# Altium PCB science_board_25.PcbDoc (part 2 of 2)
Units mil, origin at the board's own origin, x right, y up, seen from the top; angles counter-clockwise.
Board outline 2760 x 2600 mil, 4 copper layers (Top Layer, Layer 2 (GND), Layer 3 (GND), Bottom Layer), stack 23.756 mil thick; 143 components, 77 nets, 418 pads, 140 vias.
Unrouted connection lines stored in the file: 90.
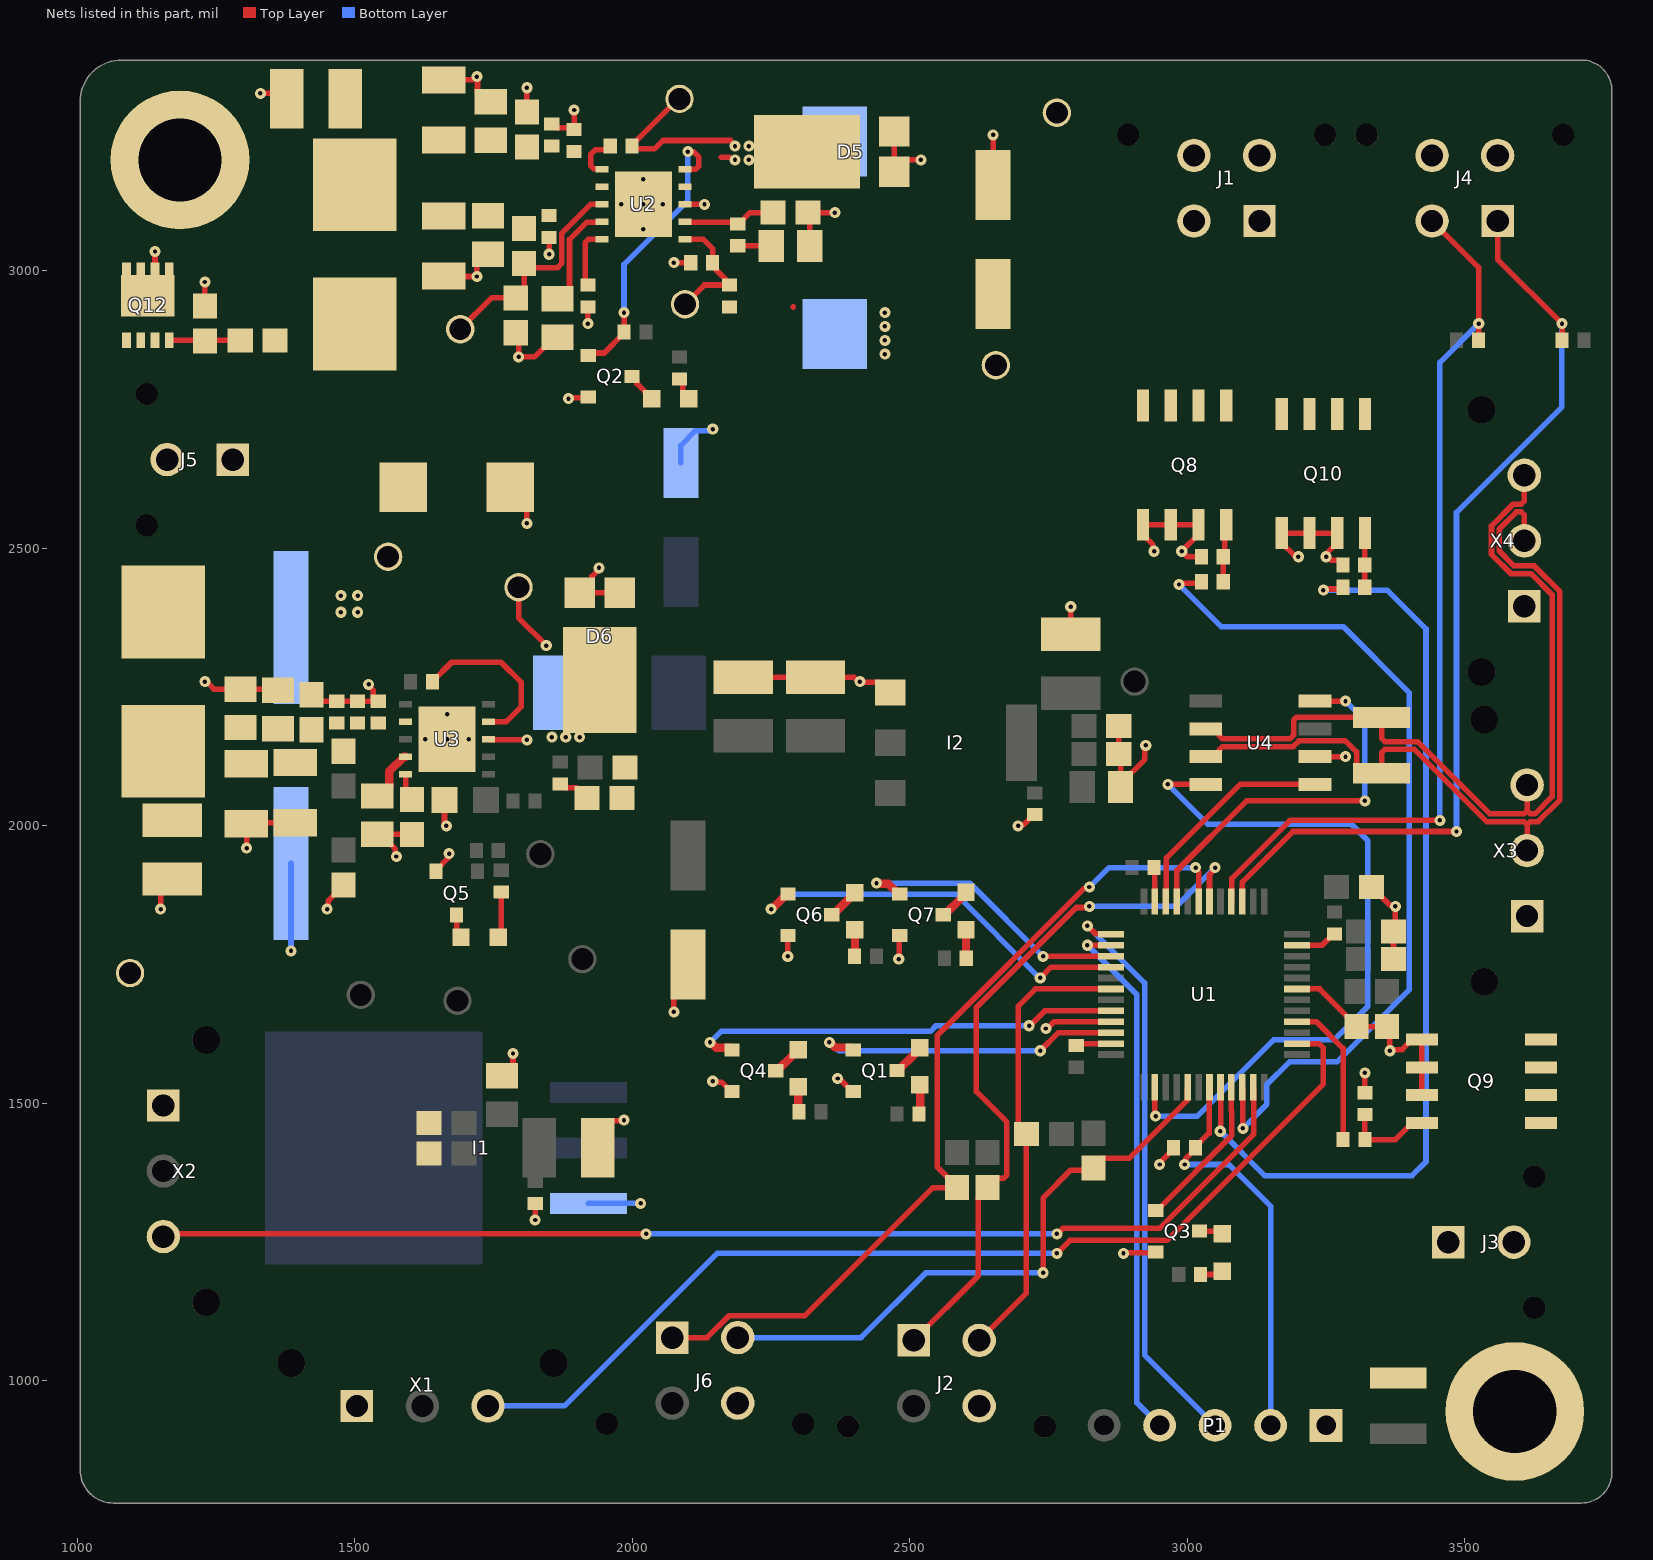
[diagram p4: the nets of this part, all layers, seen from the top]

## Via types
v1: diameter 20, hole 8, Top Layer to Bottom Layer, 140 vias

## Nets (pads, with @x,y where several pads share a name; then routed paths per layer and width w, separated by ;. In a path a pad name is that pad's centre, name@x,y a point inside that pad or via, vN(x,y) a via of type N, cw(c..) or ccw(c..) an arc to the next point about the centre after c; other vN are vias at no path point) (continued)
7V_RTCLK: R21.2 U3.5 | length 50.1
  Top Layer w10: U3.5@1591.49,2093.05 1591.49,2059.18 R21.2@1602.95,2047.72
7V_SSTR: C34.2 U3.4 | length 96.8
  Top Layer w15: C34.2@1540.5,2054.07 1546.6,2054.07 1561.93,2069.41 1561.93,2097.71 1588.77,2124.55 U3.4@1591.49,2124.55
7V_SW: 7V_SW.1 C14.2 D6.2 L2.1 U3.9 | length 429.3
  Top Layer w10: C14.2@1639.68,2260 1674.68,2295 1763.28,2295 1800,2258.28 1800,2215 1772.54,2187.54 U3.9@1741.09,2187.54 ; 7V_SW.1@1795,2430 1795,2375 v1(1845,2325)
  other v1: 1855,2160 1880,2160 1905,2160
12V_BOOT: C11.1 U2.1 | length 84.8
  Top Layer w10: U2.1@1945.2,3182.99 1944.29,3183.9 1930.86,3183.9 1925,3189.76 1925,3210 1933.5,3218.5 1953.82,3218.5 C11.1@1960.32,3225
12V_COMP: C16.2 R8.2 U2.7 | length 168.7
  Top Layer w10: U2.7@2094.8,3088.5 2095.71,3087.6 2187.09,3087.6 R8.2@2190,3084.68 2191.97,3084.68 2212.28,3105 C16.2@2253.5,3105
12V_EN: 12V_EN.1 R19.1 R20.2 U2.3 | length 415.9
  Top Layer w10: 12V_EN.1@1690,2895 1746.5,2951.5 R20.2@1790,2951.5 1805,2966.5 R19.1@1805,3013.5 1812.86,3005.65 1864.79,3005.65 1872.78,3013.64 1872.78,3067.78 1925,3120 U2.3@1946.93,3120
12V_FB: 12V_FB.1 R7.1 R10.2 U2.6 | length 225.5
  Top Layer w10: U2.6@2094.8,3057.01 2127.99,3057.01 2144.68,3040.32 R10.2@2144.68,3015 2151.5,3008.19 2151.5,3001.22 2173.03,2979.68 R7.1@2175,2979.68 ; 12V_FB.1@2095,2940 2129.68,2974.68 R7.1@2175,2974.68
12V_HEATER: 12V_H.1 C10.2 J1.3 J1.4 L1.2 R7.2 | length 0.4
  Top Layer w10: R7.2@2175,2935.32 R7.2@2175.16,2935.16 ; 2289.84,2935.16 2290,2935
  other v1: 2455,2850 2455,2875 2455,2900 2455,2925
12V_PGOOD: Q2.1 R5.1 U2.10 | length 524.2
  Top Layer w10: Q2.1@1920.63,2847.4 1925.35,2852.13 1949.41,2852.13 1985.32,2888.03 R5.1@1985.32,2890 1985.16,2890.16 1985.16,2924.84 v1(1985,2925) ; U2.10@2094.8,3182.99 2114.14,3182.99 2120,3188.85 2120,3205 2110,3215 v1(2100,3215)
  Bottom Layer w10: v1(1985,2925) 1985,3011.72 2100,3126.72 v1(2100,3215)
12V_RTCLK: R9.2 U2.5 | length 103.8
  Top Layer w10: R9.2@1915,2980 1915,3051.15 1920.86,3057.01 U2.5@1945.2,3057.01
12V_SSTR: C15.2 U2.4 | length 192.1
  Top Layer w10: C15.2@1865,2949.65 1868.94,2949.65 1886.78,2967.48 1886.78,3056.78 1917.6,3087.6 1945.1,3087.6 U2.4@1946.91,3089.41
12V_SW: 12V_SW.1 C11.2 D5.2 L1.1 U2.9 | length 313
  Top Layer w10: C11.2@1999.68,3225 2004.68,3220 2040,3220 2055,3235 2177.57,3235 ; C11.2@1999.68,3226.97 12V_SW.1@2075.06,3302.34 ; 12V_SW.1@2085,3310 12V_SW.1@2088.7,3306.3 ; 2160,3205 2175,3205
  other v1: 2185,3200 2210,3200 2185,3225 2210,3225
CAN_DEBUG1: Q6.1 U1.40 | length 736.5
  Top Layer w10: v1(2735,1726.3) 2754.37,1745.67 U1.40@2862.81,1745.67
  Top Layer w15: v1(2250,1850) 2251.26,1850 2278.66,1877.4 Q6.1@2280.63,1877.4
  Bottom Layer w10: v1(2250,1850) 2277.07,1877.07 2582.93,1877.07 2733.7,1726.3 v1(2735,1726.3)
CAN_DEBUG2: Q7.1 U1.39 | length 521.4
  Top Layer w10: v1(2740,1765) 2828.28,1765 2828.46,1765.18 2862.64,1765.18 U1.39@2862.81,1765.35
  Top Layer w15: v1(2440,1897.07) 2440.96,1896.11 2461.05,1896.11 2475.45,1881.71 Q7.1@2477.42,1881.71
  Bottom Layer w10: v1(2440,1897.07) 2607.93,1897.07 v1(2740,1765)
CAN_N: R27.2 U4.6 X3.P$3 X4.P$3 | length 1503
  Top Layer w10: U4.6@3033.15,2175 3050.87,2175 3057.68,2168.19 3057.68,2162.86 3063.54,2157 3184.78,2157 3191.47,2163.7 3191.47,2190.54 3196.74,2195.81 3349.39,2195.81 R27.2@3350,2195.2 3350,2157.86 3355.86,2152 3414.75,2152 3545.02,2021.72 3606.31,2021.72 3612.17,2027.58 ; X4.P$3@3607.17,2631.89 3607.17,2585.69 3601.31,2579.84 3587.23,2579.84 3548.05,2540.66 3548.05,2489.29 3582.68,2454.66 3619.24,2454.66 3657.29,2416.61 3657.29,2052.7 3626.31,2021.72 3618.03,2021.72 3612.17,2027.58 ; X3.P$3@3612.17,2073.78 3612.17,2027.58
CAN_P: R27.1 U4.7 X3.P$2 X4.P$2 | length 1514
  Top Layer w10: U4.7@3033.15,2125 3050.87,2125 3057.68,2131.81 3057.68,2137.14 3063.54,2143 3190.58,2143 3200.98,2153.41 3284.88,2153.41 3305,2133.28 3305,2108.5 3318.7,2094.8 R27.1@3350,2094.8 3350,2132.14 3355.86,2138 3408.95,2138 3539.22,2007.72 3606.31,2007.72 3612.17,2001.87 ; X4.P$2@3607.17,2513.78 3607.17,2559.98 3601.31,2565.84 3593.03,2565.84 3562.05,2534.86 3562.05,2495.09 3588.48,2468.66 3625.03,2468.66 3671.29,2422.4 3671.29,2046.9 3632.11,2007.72 3618.03,2007.72 3612.17,2001.87 ; X3.P$2@3612.17,1955.67 3612.17,2001.87
FDCAN_RXD: U1.33 U4.4 | length 696.1
  Top Layer w10: U1.33@2980.93,1863.78 2980.93,1919.21 3106.72,2045 v1(3320,2045) ; U4.4@3230,2225 v1(3285,2225)
  Bottom Layer w10: v1(3285,2225) 3320,2190 v1(3320,2045)
FDCAN_STB: U1.2 U4.8 | length 1285.4
  Top Layer w10: U1.2@2941.55,1529.13 2941.55,1478.44 v1(2942.87,1477.13) ; v1(2965,2075) U4.8@3033.15,2075
  Bottom Layer w10: v1(2942.87,1477.13) 3018.2,1477.13 3156.07,1615 3265,1615 3325,1675 3325,1973.63 3295.27,2003.36 3036.64,2003.36 v1(2965,2075)
FDCAN_TXD: U1.34 U4.1 | length 401.6
  Top Layer w10: U1.34@2961.24,1863.78 2962.24,1864.78 2962.24,1942.24 3095,2075 U4.1@3230,2075
GND: C1.1 C2.1 C3.1 C4.2 C5.1 C6.1 C7.1 C8.1 C9.2 C10.1 C12.1 C13.1 C15.1 C16.1 C17.1 C18.1 C19.1 C20.1 C21.1 C22.1 C23.2 C24.2 C25.1 C26.1 C27.1 C28.1 C29.1 C30.1 C31.1 C32.1 C33.1 C34.1 C35.1 C36.1 C37.1 C38.1 C39.1 C40.1 C41.1 C42.1 C43.1 C44.2 C46.1 C47.1 C48.1 C49.1 C50.1 C51.1 C52.1 D5.1 D6.1 D10.1 GND.1 I1.3 I2.1 J2.4 J4.3 J4.4 J6.4 P1.1 pad. Q1.2 Q2.2 Q3.2 Q4.2 Q5.2 Q6.2 Q7.2 Q8.2 Q9.2 Q10.2 Q12.3 R9.1 R10.1 R20.1 R21.1 R22.2 R28.1 R35.2 R36.2 R39.2 R42.2 U1.19 U1.23 U1.35 U1.45 U1.47 U2.8 U2.11 U3.8 U3.11 U4.2 X1.P$1 X2.P$1 X3.P$1 X4.P$1 | length 5054
  Top Layer w10: Q12.3@1140,3000.98 v1(1140,3035) ; v1(1150,1850) 1150,1883.46 C46.1@1170.94,1904.4 ; v1(1230,2260) 1232.71,2260 1246.13,2246.58 C47.1@1293.84,2246.58 1359.64,2246.58 C48.1@1361.62,2244.6 ; R42.2@1230,2936.5 v1(1230,2980) ; v1(1305,1960) 1305,2003.1 C18.1@1304.28,2003.82 1306.39,2005.94 C25.1@1392.92,2005.94 ; v1(1330,3320) 1367.2,3320 C36.1@1377.2,3310 ; C49.1@1422.12,2236.31 1433.67,2224.76 C50.1@1467.46,2224.76 1467.54,2224.68 C51.1@1504.95,2224.68 ; v1(1450,1850) 1451.91,1851.91 1451.91,1864.43 1480,1892.52 R28.1@1480,1893.5 ; C51.1@1504.98,2224.65 1540.36,2224.65 1540.42,2224.71 1533.61,2231.52 1533.61,2243.69 1525,2252.29 v1(1525,2255) ; v1(1575,1945) 1573.09,1946.91 1573.09,1958.29 1546.6,1984.78 C34.1@1540.5,1984.78 1540.55,1984.73 R21.1@1602.95,1984.73 ; Q5.2@1646.03,1918.12 1646.03,1920.09 1668.09,1942.15 1668.09,1948.09 v1(1670,1950) ; C12.1@1660,2990.87 1660.87,2990 v1(1720,2990) 1720,3012.52 1737.83,3030.35 C37.1@1740,3030.35 ; C13.1@1660,3344.13 1711.43,3344.13 1717.29,3350 v1(1720,3350) 1721.06,3348.94 1721.06,3322.48 1738.9,3304.65 C38.1@1745,3304.65 ; R22.2@1661.6,2046.74 1661.6,2006.11 1665,2002.71 v1(1665,2000) ; U3.8@1741.09,2156.05 1741.62,2155.52 1809.48,2155.52 v1(1810,2155) ; C29.1@1765,1549.65 1767.17,1549.65 1785,1567.48 v1(1785,1590) ; D10.1@1780.12,2610 1810,2580.12 v1(1810,2545) ; R20.1@1790,2888.5 1795,2883.5 v1(1795,2845) 1823.54,2845 1858.9,2880.35 C15.1@1865,2880.35 ; C39.1@1810,3286.5 v1(1810,3330) ; v1(1825,1290) C28.1@1825,1320 ; v1(1850,3030) C40.1@1850,3060.32 ; C42.1@1855,3264.68 1861.76,3257.92 1891.76,3257.92 C41.1@1895,3254.68 v1(1895,3290) ; v1(1885,2770) 1886.3,2771.3 1919.33,2771.3 Q2.2@1920.63,2772.6 ; v1(1920,2905) R9.1@1920,2935.32 ; C33.1@1937.8,1420 1937.8,1443.43 1962.91,1468.54 1983.54,1468.54 v1(1985,1470) ; v1(1940,2465) 1940,2462.29 1927.36,2449.66 1927.36,2442.36 D6.1@1905,2420 D6.1@1977.44,2420 ; v1(2075,1665) 2075,1725 C23.2@2100,1750 ; v1(2075,3015) R10.1@2105.32,3015 ; U2.8@2094.8,3120 v1(2130,3120) ; v1(2145,1540) 2146.91,1538.09 2161.24,1538.09 2177.8,1521.52 Q4.2@2179.77,1521.52 ; C32.1@2200,2267.8 C26.1@2330,2267.8 2399.5,2267.8 2407.29,2260 v1(2410,2260) 2410.83,2259.17 2446.38,2259.17 I2.1@2465,2240.55 ; v1(2280,1765) 2280.32,1765.32 2280.32,1802.28 Q6.2@2280.63,1802.6 ; C17.1@2319.65,3045 2319.65,3101.85 C16.1@2316.5,3105 v1(2365,3105) ; v1(2370,1545) 2371.91,1543.09 2374.68,1543.09 2396.13,1521.64 Q1.2@2398.09,1521.64 ; D5.1@2471.77,3251.22 D5.1@2471.77,3178.78 2492.99,3200 v1(2520,3200) ; v1(2480,1760) 2480.86,1760.86 2480.86,1801.73 Q7.2@2481.73,1802.6 ; C10.1@2650,3155 v1(2650,3245) ; v1(2695,2000) 2696.91,2001.91 2704.63,2001.91 2723.03,2020.32 C20.1@2725,2020.32 ; v1(2745,1635) 2747.71,1635 2759.95,1647.24 U1.45@2862.81,1647.24 ; C31.1@2790,2345 v1(2790,2395) ; C3.1@2800,1604.68 2803.19,1607.87 U1.47@2862.81,1607.87 ; C22.1@2876.5,2180 C19.1@2876.5,2130 2879.65,2126.85 C21.1@2879.65,2076.1 ; C21.1@2879.65,2070 C21.1@2879.65,2076.1 ; v1(2885,1230) 2886.3,1231.3 2941.86,1231.3 Q3.2@2943.16,1232.6 ; v1(2925,2145) 2923.54,2143.54 2923.54,2120 C21.1@2879.65,2076.1 ; v1(2940,2495) 2938.09,2496.91 2938.09,2506.91 2920,2525 Q8.2@2920,2542.75 Q8.2@2970,2542.75 Q8.2@3020,2542.75 3020,2525 v1(2990,2495) 2990.48,2495 3000.48,2485 R35.2@3025.32,2485 ; U1.35@2941.55,1863.78 C2.1@2941.55,1925 ; v1(2950,1390) 2951.91,1391.91 2951.91,1394.63 2975.32,1418.03 C9.2@2975.32,1420 ; U1.19@3197.46,1706.3 3238.19,1706.3 3305,1639.49 C5.1@3305,1638.5 C6.1@3360,1638.5 3365,1633.5 v1(3365,1595) 3366.91,1596.91 3386.91,1596.91 3405,1615 Q9.2@3422.75,1615 Q9.2@3422.75,1565 Q9.2@3422.75,1515 ; U1.23@3197.46,1785.04 3242.75,1785.04 3263.03,1805.32 C1.1@3265,1805.32 ; v1(3200,2485) 3198.09,2486.91 3193.09,2486.91 3170,2510 Q10.2@3170,2527.75 Q10.2@3220,2527.75 Q10.2@3270,2527.75 3270,2510 3251.91,2491.91 3251.91,2486.91 v1(3250,2485) 3252.71,2485 3258.93,2478.78 3273.5,2478.78 3280.32,2471.97 R39.2@3280.32,2470 ; U4.2@3230,2125 v1(3285,2125) ; R36.2@3320,1519.37 v1(3320,1555) ; C4.2@3331.5,1890 3332.48,1890 3365.57,1856.91 3373.09,1856.91 v1(3375,1855) 3375,1813.5 C8.1@3371.5,1810 C7.1@3371.5,1760
  Bottom Layer w10: v1(1385,1775) C35.1@1385,1932.4 ; I1.3@1921,1320 v1(2015,1320) ; C24.2@2087.6,2654.18 2087.6,2685.68 2114.09,2712.18 2139.47,2712.18 2142.29,2715 v1(2145,2715)
  other v1: 1626.58,2156.11 1666.29,2156.05 1705.51,2156.11 1666.58,2201.11 2020,3075 1980,3120 2020,3120 2055,3120 2020,3165
H1-: J1.2 Q8.3
H2-: J1.1@3130,3090 Q10.3
Heater1: R33.1 U1.10 | length 1571.9
  Top Layer w10: v1(2985,2435) 2986.91,2436.91 3022.23,2436.91 R33.1@3025.32,2440 ; U1.10@3099.04,1529.13 3099.52,1528.65 3099.52,1455.48 v1(3100,1455)
  Bottom Layer w10: v1(2985,2435) 3060.92,2359.08 3280.92,2359.08 3399.76,2240.24 3399.76,1704.76 3270,1575 3184.35,1575 3143.13,1533.78 3143.13,1498.13 v1(3100,1455)
Heater2: R37.1 U1.8 | length 1704.9
  Top Layer w10: v1(3059.35,1450) 3059.83,1450.48 3059.83,1528.96 U1.8@3059.67,1529.13 ; v1(3245,2425) 3246.91,2426.91 3277.23,2426.91 R37.1@3280.32,2430
  Bottom Layer w10: v1(3059.35,1450) 3139.35,1370 3405,1370 3430,1395 3430,2355 3360,2425 v1(3245,2425)
"Humidity (I2C3_SCL)": J2.1@2506.88,1073.11 R2.1 U1.30 | length 1276.2
  Top Layer w10: J2.1@2506.88,1073.11 2623.35,1189.58 R2.1@2623.35,1331.85 ; R2.1@2640,1348.5 2656.36,1364.87 2669.14,1364.87 2675,1370.72 2675,1466.42 2620,1521.42 2620,1673.28 2799.8,1853.09 2821.73,1853.09 v1(2823.65,1855) ; U1.30@3039.98,1863.78 3039.98,1912.27 3050,1922.29 v1(3050,1925)
  Bottom Layer w10: v1(2823.65,1855) 2980,1855 v1(3050,1925)
Humidity_SDA: J2.2 R1.1 U1.42 | length 824.1
  Top Layer w10: J2.2@2625,1073.11 2710,1158.11 R1.1@2710,1445 2695,1460 2695,1675 2726.3,1706.3 U1.42@2862.81,1706.3
"Methane (ADC2)": U1.14 X1.P$3 | length 1860.9
  Top Layer w10: v1(2765,1230) 2788.41,1253.41 2963.21,1253.41 3245,1535.2 3245,1600 3237.13,1607.87 U1.14@3197.46,1607.87
  Bottom Layer w10: X1.P$3@1740,955 1877.71,955 2152.71,1230 v1(2765,1230)
NetC17_2: C17.2 R8.1 | length 60.5
  Top Layer w10: R8.1@2190,3045.32 2250.04,3045.32 C17.2@2250.35,3045
NetC44_1: C44.1 R17.1 | length 59.1
  Top Layer w10: R17.1@1870,2075.63 1876.81,2068.82 1898.7,2068.82 1917.52,2050 C44.1@1918.5,2050
NetD1_1: D1.1 R13.1 | length 54.2
  Top Layer w15: R13.1@2516.4,1480.83 2518.53,1482.97 2518.53,1532.79 D1.1@2517.56,1533.76
NetD1_2: D1.2 Q1.3 | length 59.7
  Top Layer w15: Q1.3@2476.83,1559.04 2478.8,1559.04 2509.31,1589.56 2509.31,1592.51 D1.2@2517.56,1600.76
NetD2_1: D2.1 R18.1 | length 42.4
  Top Layer w10: R18.1@2085,2805.32 2091.25,2799.06 2091.25,2780.75 D2.1@2102,2770
NetD2_2: D2.2 Q2.3 | length 55.9
  Top Layer w10: Q2.3@1999.37,2810 2001.34,2810 2008.15,2803.19 2008.15,2796.85 D2.2@2035,2770
NetD3_1: D3.1 R14.1 | length 50.1
  Top Layer w10: R14.1@3023.87,1191.78 3056.42,1191.78 D3.1@3062.64,1198
  Top Layer w15: R14.1@3023.87,1191.78 R14.1@3026.98,1194.89 ; D3.1@3059.53,1194.89 D3.1@3062.64,1198
NetD3_2: D3.2 Q3.3 | length 42.8
  Top Layer w10: Q3.3@3021.9,1270 3057.64,1270 D3.2@3062.64,1265
NetD4_1: D4.1 R15.1 | length 37.5
  Top Layer w15: R15.1@2299.08,1492.37 2299.16,1492.45 D4.1@2299.24,1529.84 D4.1@2299.24,1529.84
NetD4_2: D4.2 Q4.3 | length 56.4
  Top Layer w15: Q4.3@2258.51,1558.92 2260.48,1558.92 2290.15,1588.59 2290.99,1588.59 D4.2@2299.24,1596.84
NetD7_1: D7.1 R24.2 | length 83.6
  Top Layer w10: D7.1@1758.34,1799.26 1763.59,1804.51 R24.2@1763.59,1880.72
NetD7_2: D7.2 Q5.3 | length 39.9
  Top Layer w10: D7.2@1682.88,1800.16 1683.34,1800.62 Q5.3@1683.34,1839.89
NetD8_1: D8.1 R26.1 | length 37.5
  Top Layer w15: R26.1@2401.12,1775.56 D8.1@2401.1,1813
NetD8_2: D8.2 Q6.3 | length 58.4
  Top Layer w15: Q6.3@2359.37,1840 2361.34,1840 2392.85,1871.51 2392.85,1871.75 D8.2@2401.1,1880
NetD9_1: D9.1 R29.1 | length 37.5
  Top Layer w15: 2601.12,1775.69 2601.16,1775.73 2601.16,1813.11 D9.1@2601.2,1813.15
NetD9_2: D9.2 Q7.3 | length 58.2
  Top Layer w15: Q7.3@2560.47,1840 2562.44,1840 2592.95,1870.51 2592.95,1871.9 D9.2@2601.2,1880.15
NetJ3_2: J3.2 R3.1
NetQ8_1: Q8.1 R33.2 R35.1 | length 105
  Top Layer w10: R33.2@3064.68,2440 R35.1@3064.68,2485 3067.34,2487.66 3067.34,2540.09 Q8.1@3070,2542.75
NetQ9_1: Q9.1 R34.2 R36.1 | length 160.2
  Top Layer w10: R36.1@3320,1480 R34.2@3320,1435 3375,1435 3405,1465 Q9.1@3422.75,1465
NetQ10_1: Q10.1 R37.2 R39.1 | length 97.9
  Top Layer w10: R37.2@3319.68,2430 R39.1@3319.68,2470 3319.84,2470.16 3319.84,2527.59 Q10.1@3320,2527.75
NetQ12_1: Q12.1 R41.2 R42.1 | length 129.2
  Top Layer w10: Q12.1@1165.59,2875 1228.5,2875 R42.1@1230,2873.5 1231.5,2875 R41.2@1293.5,2875
NetU1_2: 
NRST: C9.1 P1.2 U1.7 | length 736.8
  Top Layer w10: v1(2995,1390) 2996.91,1391.91 2996.91,1400.26 C9.1@3014.64,1417.99 ; C9.1@3014.68,1420 3014.68,1421.97 3039.35,1446.63 3039.35,1528.5 U1.7@3039.98,1529.13
  Bottom Layer w10: v1(2995,1390) 3075,1390 3150,1315 P1.2@3150,920
"Oxygen (I2C2_SCL)": J6.1@2071.88,1078.11 R6.1 U1.31 | length 1568.2
  Top Layer w10: J6.1@2071.88,1078.11 2134.68,1078.11 2173.8,1117.23 2310.51,1117.23 2541.79,1348.5 R6.1@2585,1348.5 2585,1349.49 2549.35,1385.14 2549.35,1622.43 2815,1888.09 2821.73,1888.09 v1(2823.65,1890) ; v1(3015,1925) 3015,1922.29 3020.3,1917 U1.31@3020.3,1863.78
  Bottom Layer w10: v1(2823.65,1890) 2858.65,1925 v1(3015,1925)
"Oxygen (I2C2_SDA)": J6.2 R4.1 U1.5 | length 1100.7
  Top Layer w10: J6.2@2190,1078.11 J6.2@2198.07,1086.18 ; v1(2740,1195) 2740,1330 2789.98,1379.98 2827.27,1379.98 R4.1@2830.69,1383.4 ; R4.1@2830.69,1384.38 2847.35,1401.04 2895.06,1401.04 2999.61,1505.59 2999.61,1528.13 U1.5@3000.61,1529.13
  Bottom Layer w10: J6.2@2190,1078.11 2412,1078.11 2528.89,1195 v1(2740,1195)
RevPolDrain: J5.2 Q12.2
SCIENCE_DEBUG1: Q1.1 U1.46 | length 576.2
  Top Layer w10: v1(2735,1595) 2767.56,1627.56 U1.46@2862.81,1627.56
  Top Layer w15: v1(2355,1610) 2356.35,1610 2365.6,1600.76 2393.78,1600.76 Q1.1@2398.09,1596.44
  Bottom Layer w10: v1(2355,1610) 2357.71,1610 2372.71,1595 v1(2735,1595)
SCIENCE_DEBUG2: 
SCIENCE_DEBUG3: Q4.1 U1.44 | length 791.8
  Top Layer w10: v1(2715,1640) 2716.15,1640 2743.07,1666.93 U1.44@2862.81,1666.93
  Top Layer w15: v1(2140,1610) 2141.35,1610 2150.72,1600.63 2175.46,1600.63 Q4.1@2179.77,1596.32
  Bottom Layer w10: v1(2140,1610) 2160,1630 2537,1630 2547,1640 v1(2715,1640)
SCIENCE_DEBUG_2: Q3.1 U1.9 | length 279.8
  Top Layer w10: Q3.1@2943.16,1307.4 2945.13,1307.4 3080,1442.27 3080,1485.85 3079.35,1486.5 U1.9@3079.35,1529.13
SWCLK: P1.4 U1.38 | length 961.7
  Top Layer w10: v1(2820,1785) U1.38@2862.81,1785.04
  Bottom Layer w10: v1(2820,1785) 2908.87,1696.13 2908.87,961.13 P1.4@2950,920
SWDIO: P1.3 U1.37 | length 1044.4
  Top Layer w10: v1(2820,1820) 2834.28,1805.72 2861.81,1805.72 U1.37@2862.81,1804.72
  Bottom Layer w10: v1(2820,1820) 2922.87,1717.13 2922.87,1047.13 P1.3@3050,920
Therm1: J4.2 R11.1 U1.28 | length 1633.9
  Top Layer w10: U1.28@3079.35,1863.78 3080.35,1864.78 3080.35,1905.35 3185,2010 v1(3455,2010) ; J4.2@3440.94,3090 3524.68,3006.26 R11.1@3524.68,2875 R11.1@3524.84,2875.16
  Bottom Layer w10: v1(3455,2010) 3455,2835 v1(3525,2905)
Therm2: J4.1@3559.06,3090 R12.1 U1.27 | length 1710.8
  Top Layer w10: U1.27@3099.04,1863.78 3099.04,1899.04 3190,1990 v1(3485,1990) ; J4.1@3559.06,3090 3559.06,3020.94 v1(3675,2905) 3675.16,2904.84 3675.16,2875.16 R12.1@3675.32,2875
  Bottom Layer w10: v1(3485,1990) 3485,2565.04 3675,2755.04 v1@3675,2900
"UV (ADC1)": U1.11 X2.P$3 | length 2126.3
  Top Layer w10: X2.P$3@1155,1260 1160,1265 v1(2025,1265) ; v1(2765,1265) 2765.86,1265 2775.86,1275 2950,1275 3120,1445 3120,1505.42 3119.72,1505.7 3119.72,1528.13 U1.11@3118.72,1529.13
  Bottom Layer w10: v1(2025,1265) v1(2765,1265)
VBAT: C35.2 D10.2 F1.1 F2.1 J5.1@1280,2660 R41.1 VBAT.1
  other v1: 1475,2385 1505,2385 1475,2415 1505,2415
VBAT_12V: C12.2 C13.2 C36.2 C37.2 C38.2 C39.2 C40.2 C41.2 C42.2 F1.2 R19.2 U2.2
VBAT_LDOS: C18.2 C25.2 C46.2 C47.2 C48.2 C49.2 C50.2 C51.2 C52.2 F2.2 R23.2 U3.2
WHITE_LED: R34.1 U1.16 | length 267.4
  Top Layer w10: U1.16@3197.46,1647.24 3232.76,1647.24 3280.63,1599.37 R34.1@3280.63,1435
WLED-: J3.1@3470,1250 Q9.3
pads on no net: J1.1@2893.77,3245.12 J1.1@3248.11,3245.12 J2.1@2388.77,917.99 J2.1@2743.11,917.99 J3.1@3625.12,1131.89 J3.1@3625.12,1368.11 J4.1@3322.83,3245.12 J4.1@3677.17,3245.12 J5.1@1124.88,2541.89 J5.1@1124.88,2778.11 J6.1@1953.77,922.99 J6.1@2308.11,922.99 U1.3 U1.4 U1.6 U1.12 U1.13 U1.15 U1.17 U1.18 U1.22 U1.25 U1.26 U1.29 U1.32 U1.41 U1.43 X1.1 X2.1 X3.1 X4.1

## Polygon pours and split planes (outlines as drawn)
7V_SW on Top Layer "7V_SW_L01_P030" (solid, remove dead copper, pour order 30): 1815,2175 1730,2175 1725,2180 1725,2200 1730,2205 1795,2205 1795,2210 1815,2230 1815,2320 1870,2375 2010,2375 2010,2370 2020,2360 2020,2170 1990,2140 1850,2140
VBAT on Top Layer "VBAT_L01_P001" (solid, remove dead copper, pour order 1): 1595,2435 1650,2490 1650,2645 1595,2700 1595,2770 1610,2785 1610,2995 1590,3020 1410,3020 1330,2940 1330,2840 1230,2740 1230,2570 1175,2515 1175,2510 1070,2510 1030,2470 1030,2330 1075,2285 1575,2285 1595,2305
12V_HEATER on Top Layer "12V_HEATER_L01_P005" (solid, remove dead copper, pour order 5): 2200,2915 2150,2915 2145,2920 2145,2950 2155,2960 2300,2960 2545,2960 2625,3040 2740,3040 2760,3060 2985,3285 3190,3285 3210,3265 3210,3175 3185,3150 3000,3150 2920,3070 2920,2990 2763.69,2780.32 2630.3,2779.7 2595,2815 2300,2815
WLED- on Top Layer "WLED-_L01_P024" (solid, remove dead copper, pour order 24): 3590,1620 3615,1645 3665,1645 3685,1625 3685,1455 3645,1415 3580,1415 3505,1340 3505,1225 3490,1210 3445,1210 3430,1225 3430,1380 3590,1540
NetJ3_2 on Top Layer "NETJ3_2_L01_P026" (solid, remove dead copper, pour order 26): 3420,1195 3315,1090 3315,990 3330,975 3440,975 3455,990 3455,1075 3495,1115 3550,1115 3655,1220 3655,1295 3630,1320 3550,1320 3520,1295 3520,1215 3500,1195
VBAT_LDOS on Top Layer "VBAT_LDOS_L01_P027" (solid, remove dead copper, pour order 27): 1060,2215 1080,2235 1240,2235 1270,2205 1600,2205 1610,2195 1610,2175 1605,2170 1565,2170 1505,2110 1460,2110 1430,2080 1265,2080 1255,2070 1255,1975 1240,1960 1100,1960 1060,2000
VBAT_12V on Top Layer "VBAT_12V_L01_P028" (solid, remove dead copper, pour order 28): 1410,3075 1430,3055 1700,3055 1705,3060 1775,3060 1790,3045 1825,3045 1830,3050 1830,3075 1835,3080 1870,3080 1925,3135 1955,3135 1960,3140 1960,3160 1955,3165 1930,3165 1915,3180 1915,3225 1910,3230 1880,3230 1870,3240 1845,3240 1830,3255 1790,3255 1775,3270 1630,3270 1535,3365 1455,3365 1440,3350 1440,3265 1410,3235
12V_SW on Top Layer "12V_SW_L01_P029" (solid, remove dead copper, pour order 29): 2080,3145 2085,3140 2410,3140 2430,3160 2430,3295 2425,3300 2220,3300 2140,3220 2140,3175 2130,3165 2085,3165 2080,3160 2080,3150
RevPolDrain on Top Layer "REVPOLDRAIN_L01_P032" (solid, remove dead copper, pour order 32): 1140,2900 1150,2890 1150,2850 1090,2790 1090,2750 1120,2720 1180,2720 1215,2685 1215,2615 1195,2595 1075,2595 1020,2650 1025,2655 1025,2875 1050,2900
7V_BUCK on Top Layer "7V_BUCK_L01_P033" (solid, remove dead copper, pour order 33): 2265,2020 2155,1910 2155,1890 2135,1870 2065,1870 2050,1885 2050,2020 2055,2025 2135,2100 2135,2200 2140,2205 2390,2205 2405,2190 2405,2110 2415,2100 2490,2100 2505,2085 2505,2035 2490,2020
3V3_OUT on Top Layer "3V3_OUT_L01_P019" (solid, remove dead copper, pour order 19): 2760,2030 2760,1985 2770,1975 2830,1975 2845,1990 2845,2270 2825,2290 2715,2290 2605,2180 2435,2180 2430,2175 2430,2130 2440,2120 2630,2120 2710,2040 2750,2040
5V_OUT on Top Layer "5V_OUT_L01_P038" (solid, remove dead copper, pour order 38): 1665,1490 1665,1385 1674.03,1375.97 1705,1345 1710,1340 1865,1340 1880,1355 1880,1480 1855,1505 1680,1505
GND on Top Layer "GND_L01_P041" (solid, remove dead copper, pour order 41): 1005,780 1005,3380 3755,3380 3755,780
H2- on Top Layer "H2-_L01_P037" (solid, remove dead copper, pour order 37): 3100,3135 3165,3135 3235,3065 3235,2850 3305,2780 3335,2780 3345,2770 3345,2710 3335,2700 3155,2700 3115,2740 3115,3015 3090,3040 3090,3125
H1- on Top Layer "H1-_L01_P036" (solid, remove dead copper, pour order 36): 2985,3125 3040,3125 3060,3105 3060,2815 3090,2785 3090,2715 3080,2705 2915,2705 2890,2730 2890,2915 2980,3005 2980,3120
GND on Bottom Layer "GND_L04_P044" (solid, remove dead copper, pour order 44): 1005,780 1005,3380 3755,3380 3755,780
12V_SW on Bottom Layer "12V_SW_L04_P004" (solid, remove dead copper, pour order 4): 2165,3230 2165,3190 2195,3160 2430,3160 2440,3170 2440,3300 2430,3305 2425,3305 2240,3305
3V3_OUT on Bottom Layer "3V3_OUT_L04_P021" (solid, remove dead copper, pour order 21): 2760,1710 2745,1695 2485,1695 2475,1695 2460,1687.5 2460,1670 2470,1660 2745,1660 2760,1645 2760,1535 2725,1500 2375,1500 2360,1485 2360,1470 2375,1455 2855,1455 2870,1470 2871.62,1507.4 2802.49,1554.05 2802.49,1916.45 2825,1945 3165,1945 3220,1890 3220,1855 3240,1835 3240,1695 3250,1685 3275,1685 3290,1695 3290,1830 3310,1850 3310,1860 3290,1880 3290,1925 3235,1980 2875,1980 2840,2015 2765,2015 2760,2010
VBAT on Bottom Layer "VBAT_L04_P025" (solid, remove dead copper, pour order 25): 1505,2460 1540,2425 1540,2315 1430,2205 1345,2205 1310,2240 1310,2480 1350,2520 1445,2520
7V_BUCK on Bottom Layer "7V_BUCK_L04_P031" (solid, remove dead copper, pour order 31): 1870,1965.5 1835,1997 1835,2055 1845,2065 2015,2065 2030,2080 2030,2530 2060,2560 2365,2560 2400,2525 2400,2340 2330,2270 2330,2010 2320,2000 2200,2000 2015,1815 2015,1510 1995,1490 1860,1490 1840,1510 1840,1810 1870,1840
5V_OUT on Bottom Layer "5V_OUT_L04_P035" (solid, remove dead copper, pour order 35): 1760,1475 1785,1450 2015,1450 2035,1430 2035,1385 2020,1370 1780,1370 1760,1350 1760,1155 1680,1075 1680,920 1720,880 1995,880 2020,905 2020,990 2040,1010 2100,1010 2115,995 2115,915 2150,880 2405,880 2440,915 2440,995 2465,1020 2545,1020 2565,1000 2565,920 2610,875 3345,875 3355,865 3355,835 3335,815 1625,815 1570,870 1570,1005 1545,1030 1495,1030 1205,1320 1120,1320 1095,1345 1095,1395 1125,1425 1255,1425 1290,1460 1290,1610 1325,1645 1735,1645 1760,1620
7V_SW on Bottom Layer "7V_SW_L04_P039" (solid, remove dead copper, pour order 39): 1815,2310 1815,2175 1845,2145 1920,2145 1935,2160 1935,2305 1925,2315 1820,2315
12V_HEATER on Bottom Layer "12V_HEATER_L04_P040" (solid, remove dead copper, pour order 40): 2305,2950 2305,2825 2315,2815 2455,2815 2470,2830 2470,2940 2455,2955 2310,2955
GND on Layer 2 (GND) "GND_L02_P042" (solid, remove dead copper, pour order 42): 1005,780 1005,3380 3755,3380 3755,780
GND on Layer 3 (GND) "GND_L03_P043" (solid, remove dead copper, pour order 43): 1005,780 1005,3380 3755,3380 3755,780

## Silkscreen, mask and mechanical layers (free items; w line width, h text height)
Top Overlay:
  drawing of 2297 lines, arcs and shapes, not listed
  text "Heater" at 2962.12,2926.11 h30
  text "Thermistors" at 3372.06,2919.67 h30
  text "12V" at 2945.12,2864.11 h30
  text "12V" at 3125.12,2864.11 h30
  text "GND" at 3375.06,2861 h30
  text "GND" at 3555.06,2861 h30
  text "H1" at 2965.12,2824.11 h30
  text "H2" at 3140.12,2824.11 h30
  text "Therm1" at 3295,2815 h30
  text "Therm2" at 3475,2815 h30
  text "VBAT+" at 1510,2785 h30 r270
  text "VBAT-" at 1465,2740 h30 r270
  text "VBAT" at 1393,2712 h30 r270
  text "CAN_N" at 3465,2610 h30 r90
  text "CAN_P" at 3465,2445 h30 r90
  text "CAN_2" at 3395,2440 h30 r90
  text "NV AS CK JH DM ER" at 2133,2413 h40
  text "GND" at 3470,2340 h30 r90
  text "CAN_N" at 3470,2050 h30 r90
  text "CAN_D1" at 2286,1971 h30
  text "CAN_D2" at 2481,1971 h30
  text "CAN_1" at 3400,1900 h30 r90
  text "CAN_P" at 3470,1875 h30 r90
  text "GND" at 3470,1770 h30 r90
  text "GND" at 1356,1550.22 h30 r270
  text "SCI_D3" at 2106,1456 h30
  text "SCI_D1" at 2331,1426 h30
  text "UV" at 1281,1415.22 h30 r270
  text "5V" at 1356,1410.22 h30 r270
  text "SCI_D2" at 2945,1345 h30
  text "O_SCL" at 1862.88,1326 h30
  text "O_SDA" at 2067.88,1326 h30
  text "H_SCL" at 2390,1325 h30
  text "H_SDA" at 2676,1321 h30
  text "UV" at 1350,1296.22 h30 r270
  text "5V" at 2432.88,1281 h30
  text "5V" at 1907.88,1276 h30
  text "GND" at 2102.88,1276 h30
  text "GND" at 2656,1276 h30
  text "5V" at 3264.12,1239.11 h30 r90
  text "Oxygen" at 2017.88,1206 h30
  text "Humidity" at 2452.88,1206 h30
  text "WLED-" at 3215.12,1183.11 h30 r90
  text "WLED" at 3352.11,1176 h30 r90
  text "GND" at 1451.64,1151 h30
  text "5V" at 1591.64,1151 h30
  text "Methane" at 1665.64,1145 h30
  text "SWCLK" at 2860,1115 h30
  text "NRST" at 3095,1115 h30
  text "Methane" at 1496.64,1081 h30
  text "3V3" at 2800,1070 h30
  text "SWDIO" at 2965,1070 h30
  text "GND" at 3210,1070 h30
  text "Flashing" at 2928,989.67 h30
Mechanical 1:
  the board outline again, w10